# Altium PCB PCB2.PcbDoc
Units mm, origin at the board's own origin, x right, y up, seen from the top; angles counter-clockwise.
Board outline 50 x 40 mm, 2 copper layers (Top Layer, Bottom Layer); 11 components, 5 nets, 23 pads, 4 vias.
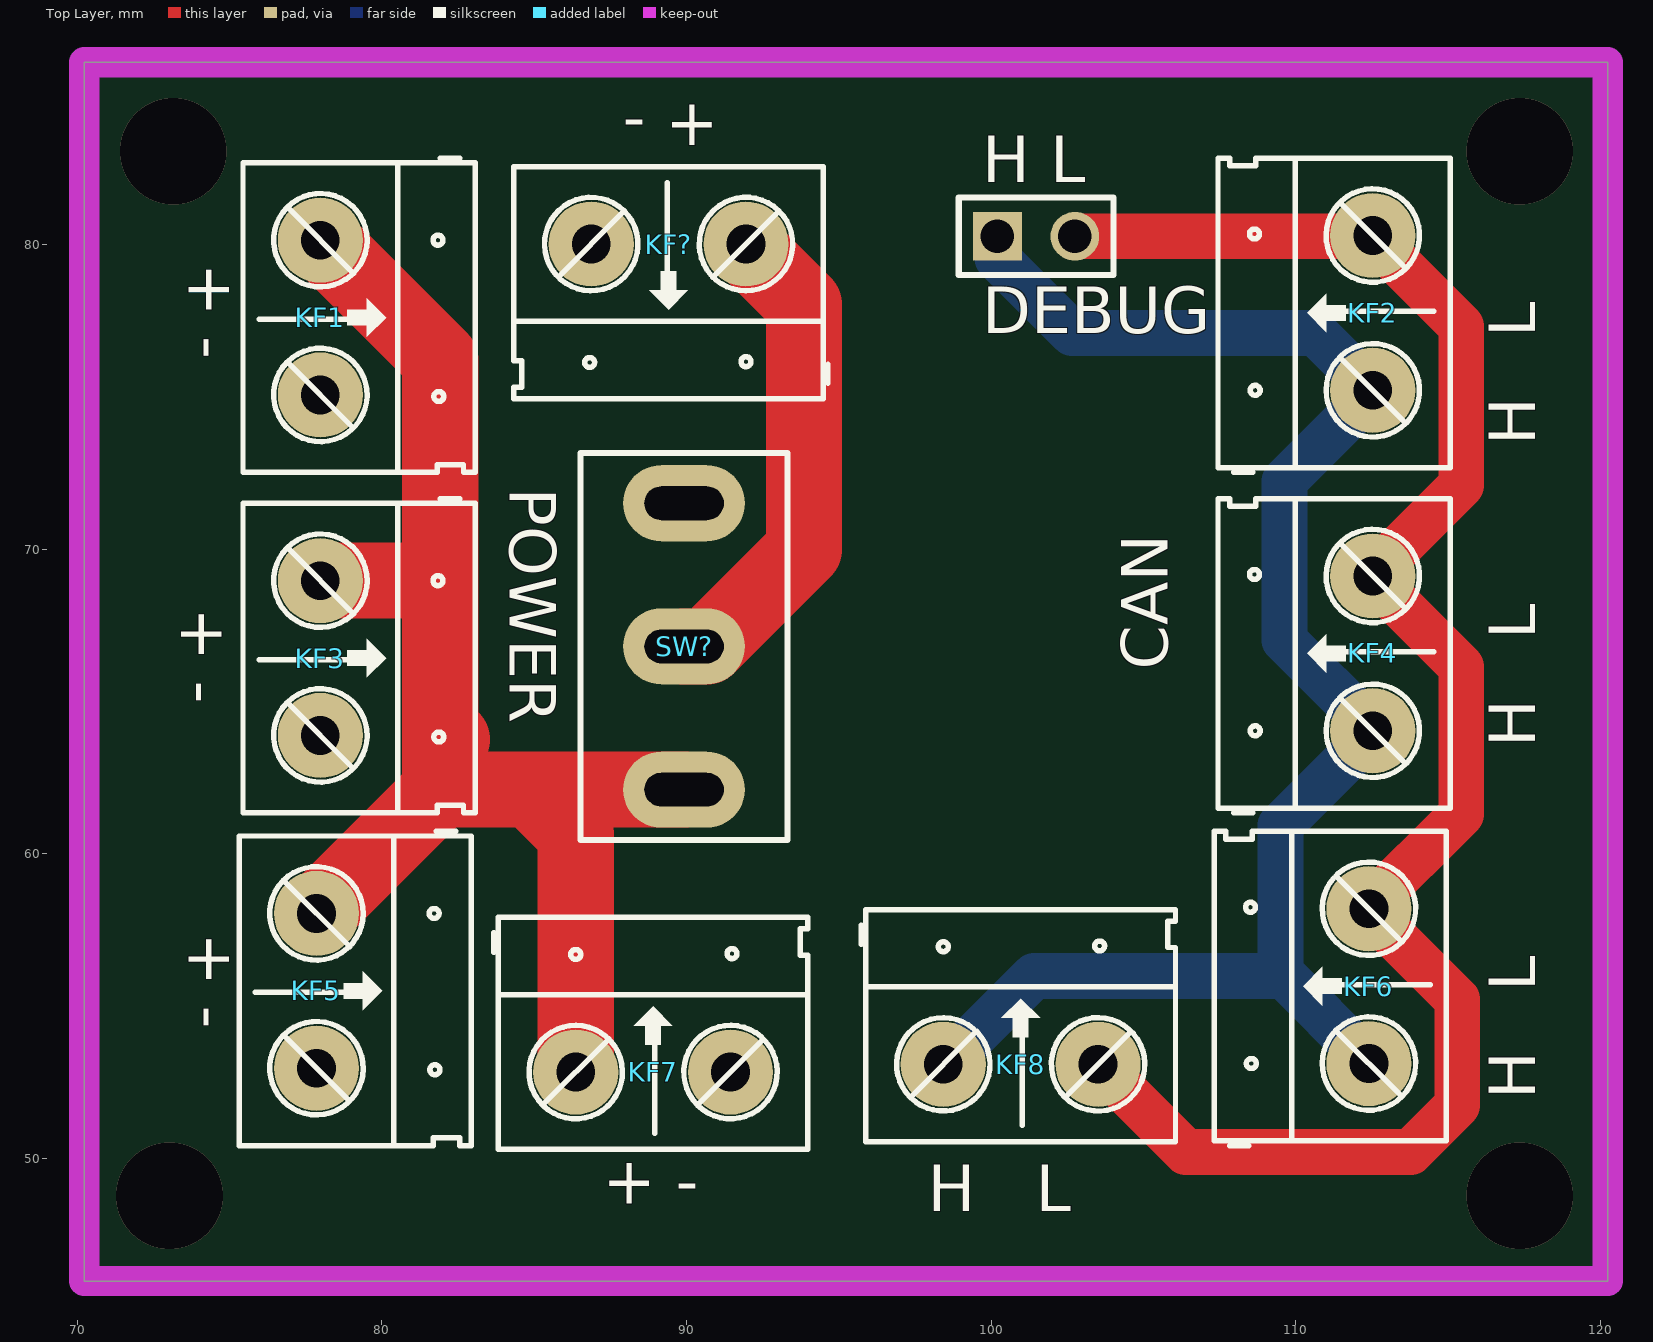
[diagram p0: Top Layer view]
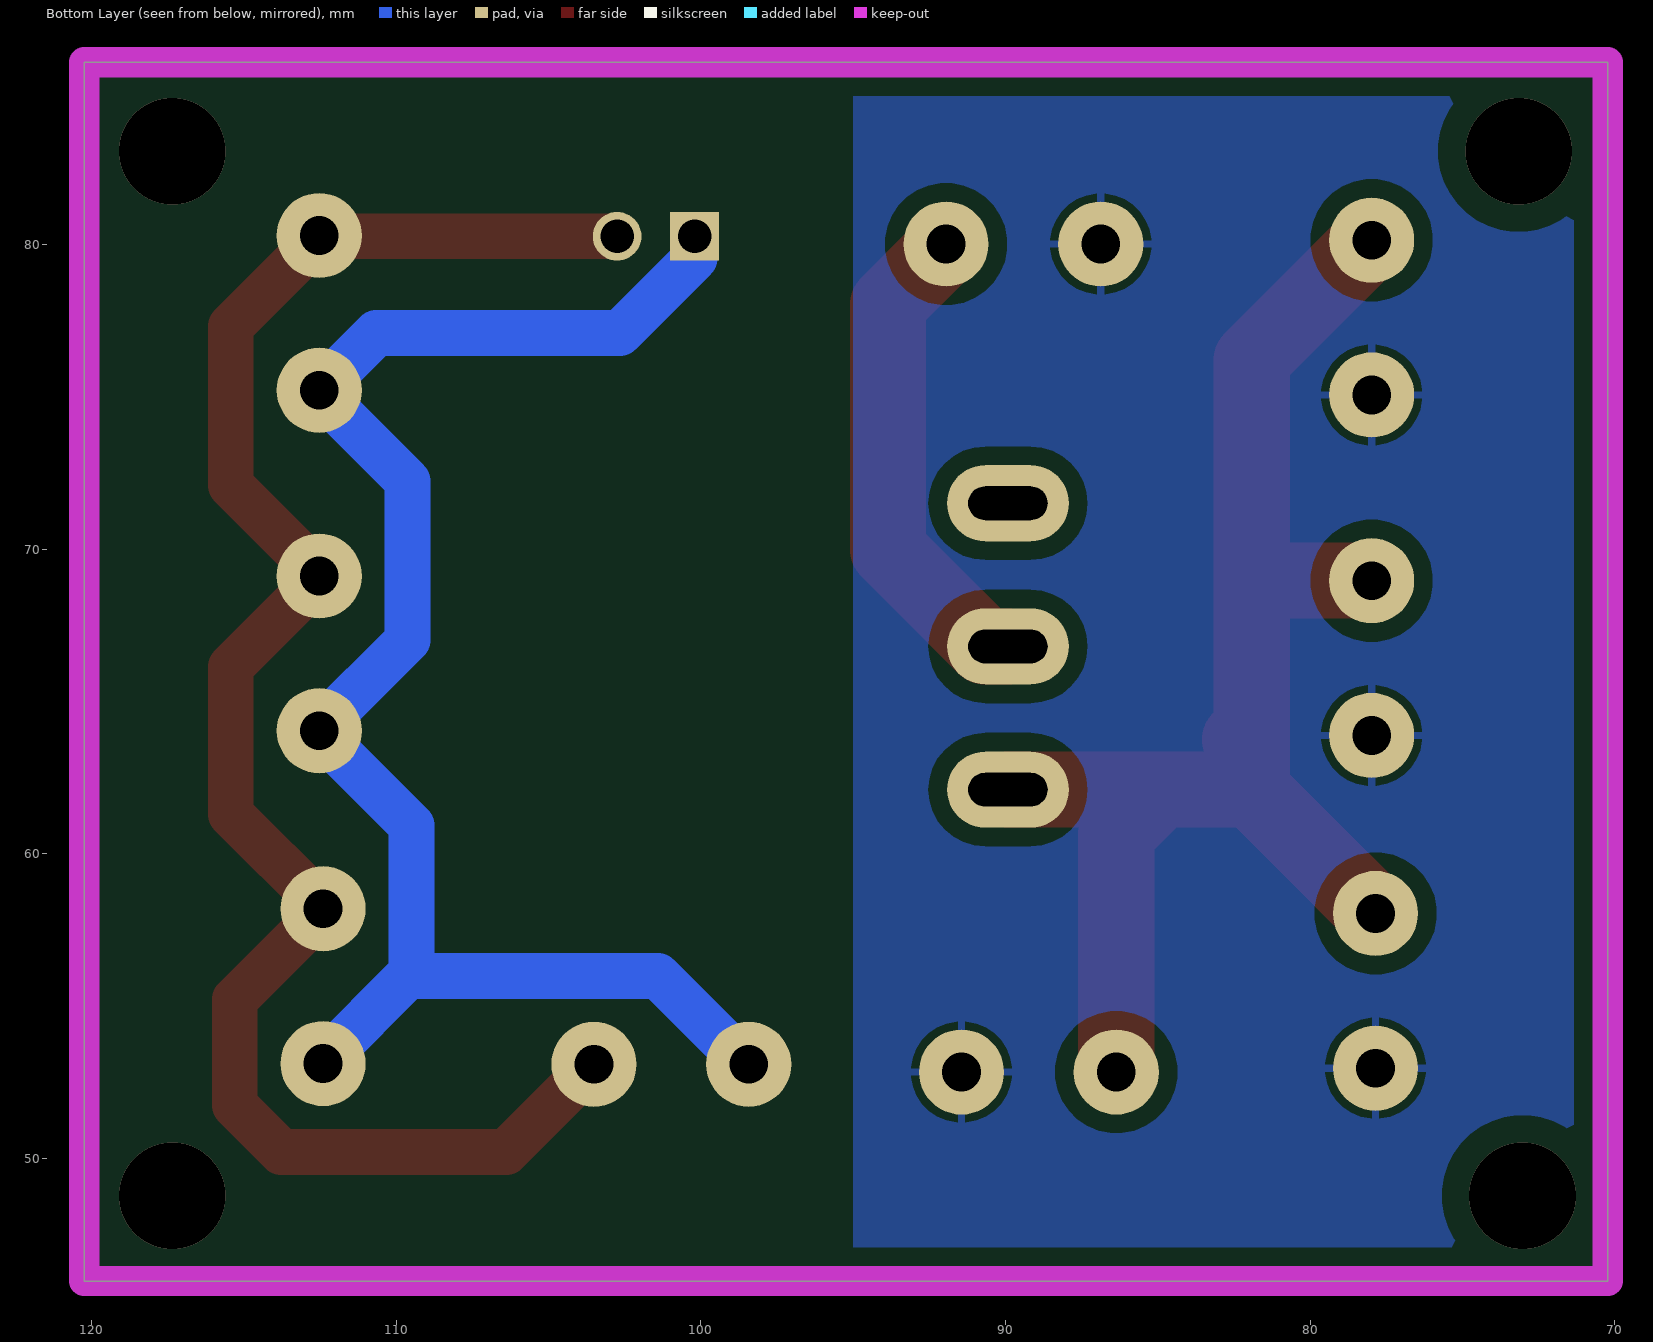
[diagram p1: Bottom Layer view, seen from below]
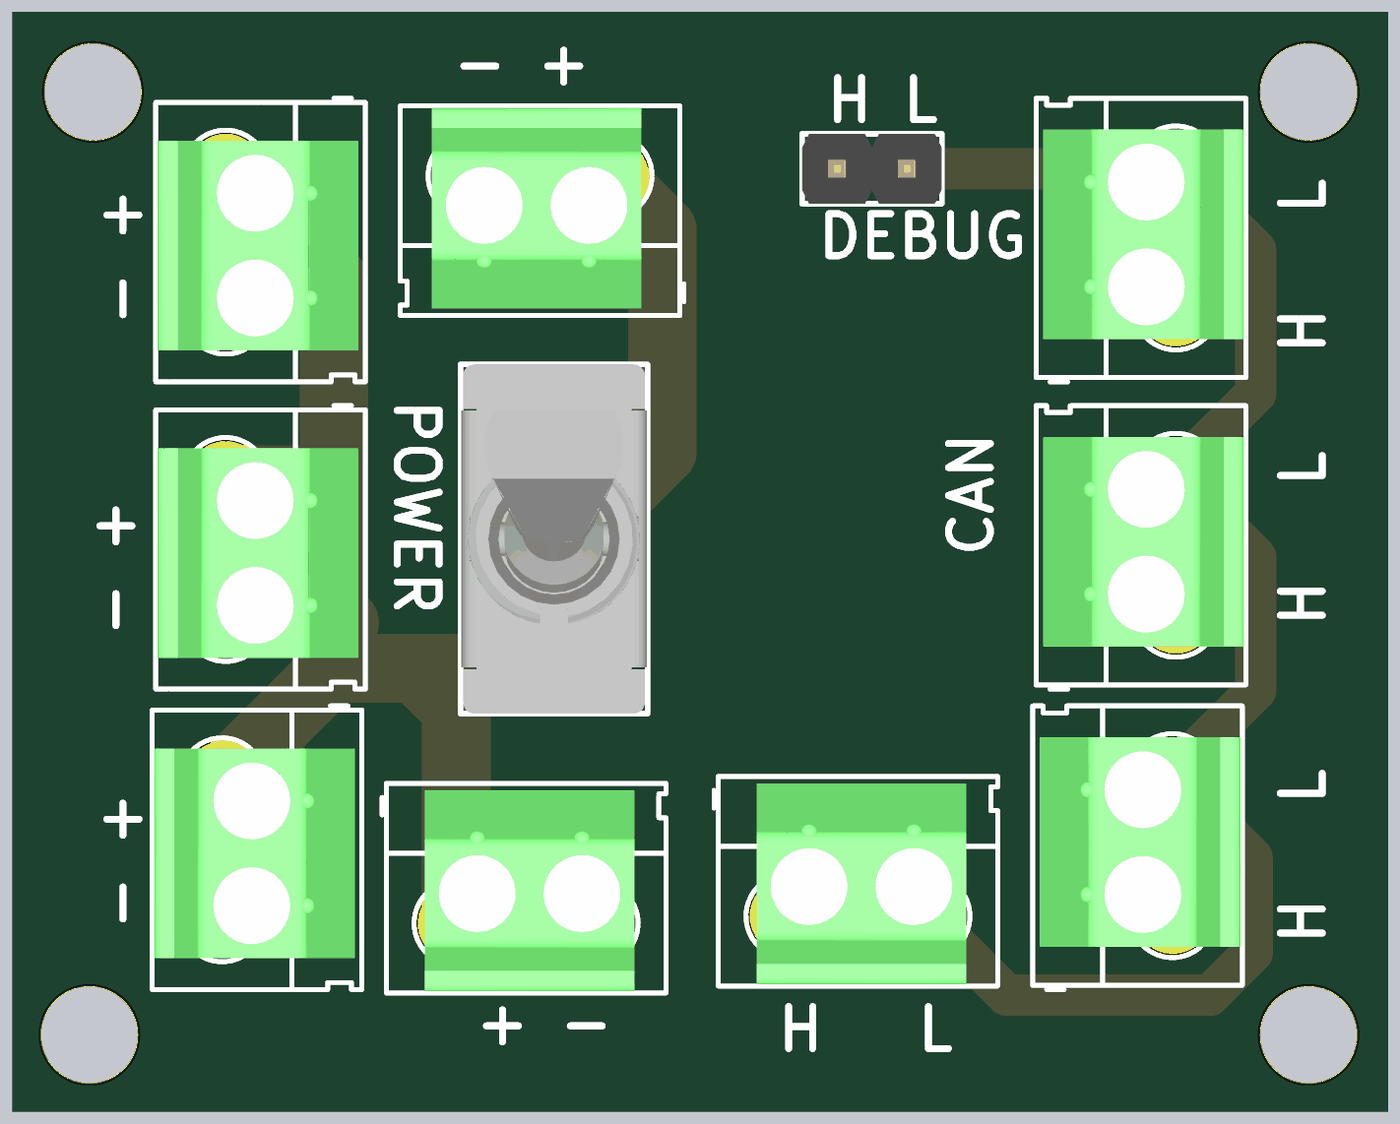
[diagram p2: 3D render of the assembled board from above, using the file's embedded part models]

## Layer stack, top to bottom
Top Solder: solder mask 0.0102, Solder Resist, Dk 3.5
Top Layer: signal copper 0.0356
Dielectric 1: dielectric 0.32, FR-4, Dk 4.8
Bottom Layer: signal copper 0.0356
Bottom Solder: solder mask 0.0102, Solder Resist, Dk 3.5

## Board outline
70.231,45.974 70.231,85.974 120.231,85.974 120.231,45.974

## Design rules (kind name [scope] priority, off if disabled: settings)
Clearance [All] p1: gap=0.6 ignorepadtopadclearanceinfootprint=FALSE
PolygonConnect [All] p1: connectstyle=Relief reliefconductorwidth=0.254 reliefentries=4 polygonreliefangle="90 Angle" airgapwidth=0.254
RoutingVias [All] p1: holewidth=0.711 width=1.27 viastyle="Through Hole" minholewidth=0.711 minwidth=1.27 maxholewidth=0.711 maxwidth=1.27
SolderMaskExpansion [All] p1: expansion=0.102 istentingtop=FALSE
Width [All] p1: maxlimit=2.5 minlimit=0.254 preferedwidth=1.5
30 further rules are at their usual default settings.

## Components (designator, comment, footprint, x,y, rotation, side; value= is the part's Value field where it differs from the comment)
DEBUG "JP 1x2 2.54" "JP 1x2 DT" 100.203,80.264 r0 top (schematic designator JP1)
KF1 "CON 2 KF301" "Con 2 KF301 5.08" 77.978,80.137 r270 top
KF2 "CON 2 KF301" "Con 2 KF301 5.08" 112.522,75.209 r90 top
KF3 "CON 2 KF301" "Con 2 KF301 5.08" 77.978,68.961 r270 top
KF4 "CON 2 KF301" "Con 2 KF301 5.08" 112.522,64.033 r90 top
KF5 "CON 2 KF301" "Con 2 KF301 5.08" 77.851,58.039 r270 top
KF6 "CON 2 KF301" "Con 2 KF301 5.08" 112.395,53.111 r90 top
KF7 "CON 2 KF301" "Con 2 KF301 5.08" 86.36,52.832 r0 top
KF8 "CON 2 KF301" "Con 2 KF301 5.08" 98.425,53.086 r0 top
KF? "CON 2 KF301" "Con 2 KF301 5.08" 91.948,80.01 r180 top
SW? "7101P3YZQE" SW_TOGGLE_7101P3YZQE 89.916,66.802 r90 top

## Footprints (in the part's own frame and the unit in brackets; to place one, negate y for a bottom-side part, rotate by r counter-clockwise, add the part's x,y. Pads: shape width x height; smd on the part's side, far side on the other; paste and mask are expansions set on the pad)
"Con 2 KF301 5.08" [mil]
  round 110 hole 50: 1(0,0) 2(200,0)
  silkscreen extent -106,-100 300,200, body extent -45,-97 255,190, height 335
"JP 1x2 DT" [mm] "2 pins, 1 row, straight, gold plating"
  rect 1.6x1.6 hole 1.1: 1(0,0)
  round 1.6 hole 1.1: 2(2.54,0)
  silkscreen extent -1.27,-1.27 3.81,1.27, body extent -1.27,-1.27 3.81,1.27, height 8.54
SW_TOGGLE_7101P3YZQE [mm]
  oval 2.5x4 hole 2.6 slot 1.1 at 0 deg: 1(-4.7,0) 2(0,0) 3(4.7,0)
  silkscreen extent -6.35,-3.4 6.35,3.4, body extent -6.35,-3.38 6.35,3.38, height 30.93

## Part data
DEBUG: library part "JP 1x2 2.54 Duc Thang", "Cắm", Chung_Loai=Cắm, Don_Vi=Con, Ma_Hang=MH000903, Ten_Linh_Kien="Jump Đơn Đực 2.54MM 1x40P Thẳng 11MM"
KF1 KF2 KF3 KF4 KF5 KF6 KF7 KF8 KF?: "Cắm", Chung_Loai=Cắm, Don_Vi=Con, Ma_Hang=MH000987, Ten_Linh_Kien="CON 2 KF301-2P 5.08MM Xanh Dương"
SW?: library part SW_TOGGLE_7101P3YZQE, "SWITCH TOGGLE SPDT 5A 120V", Current Rating="5A (AC/DC)", Illumination Type, Color=-, Manufacturer=C&K, Operating Temperature="-30°C ~ 85°C", Supplier Part Number 1=CKN1019-ND, Voltage Rating - AC=120V, Voltage Rating - DC=28V, Actuator Length=11.43mm, Actuator Material="Brass, Chrome Plated", Actuator Type="Flat Anti-Rotation", Bushing Thread=1/4-40, Category=Switches, Circuit=SPDT, ComponentLink1Description=http://www.ckswitches.com/media/1394/7000toggle.pdf, ComponentLink1URL=http://www.ckswitches.com/media/1394/7000toggle.pdf, Electrical Life="100,000 Cycles", Features="Epoxy Sealed Terminals", Illumination=Non-Illuminated, Illumination Voltage (Nominal)=-, Ingress Protection=-, Manufacturer Part Number=7101P3YZQE, Mounting Type="Panel Mount", Packaging=Bulk, Panel Cutout Dimensions="Circular - 6.35mm Dia", Part Status=Active, Pricing 1="1=6.11, 10=5.801, 25=5.648, 50=5.4954, 100=5.3428, 250=5.03744, 500=4.2742, 1000=4.04523 (USD)", RoHS="RoHS Compliant", Stock 1=933, Supplier 1=Digi-Key, Switch Function=On-On, Termination Style="Solder Lug"

## Via types
v1: diameter 3.5, hole 3.5, Top Layer to Bottom Layer, 4 vias

## Nets (pads, with @x,y where several pads share a name; then routed paths per layer and width w, separated by ;. In a path a pad name is that pad's centre, name@x,y a point inside that pad or via, vN(x,y) a via of type N, cw(c..) or ccw(c..) an arc to the next point about the centre after c; other vN are vias at no path point)
12V: KF1.1 KF3.1 KF5.1 KF7.1 SW?.1 | length 47.8
  Top Layer w2.5: KF5.1 81.915,62.103 ; KF3.1 81.915,68.961 ; KF1.1 81.915,76.2 81.915,68.961 ; 82.297,63.753 81.915,64.135 ; KF7.1 86.36,60.639 84.897,62.102 ; SW?.1 84.897,62.102 ; 81.915,62.103 81.916,62.102 84.897,62.102 ; 81.915,62.103 81.915,64.135 ; 81.915,64.135 81.915,68.961
CANH: DEBUG.1 KF2.1 KF4.1 KF6.1 KF8.1 | length 54
  Bottom Layer w1.5: KF8.1 98.505,53.086 101.406,55.987 109.44,55.987 ; DEBUG.1 100.203,79.546 102.66,77.089 110.642,77.089 KF2.1 112.522,75.13 109.621,72.229 109.621,67.014 112.522,64.113 KF4.1 112.522,63.954 109.494,60.926 109.494,56.092 112.395,53.191 KF6.1
CANL: DEBUG.2 KF2.2 KF4.2 KF6.2 KF8.2 | length 58
  Top Layer w1.5: DEBUG.2 112.497,80.264 KF2.2 112.522,80.21 115.423,77.309 115.423,72.094 112.522,69.193 KF4.2 112.522,69.034 115.423,66.133 115.423,61.299 112.395,58.271 KF6.2 112.395,58.112 115.296,55.211 115.296,51.742 113.764,50.21 106.381,50.21 KF8.2
GND: KF1.2 KF3.2 KF5.2 KF7.2 KF?.2
NetKF?_1: KF?.1 SW?.2 | length 16.1
  Top Layer w2.5: SW?.2 90.666,66.802 93.853,69.989 93.853,78.025 91.948,79.93 KF?.1
pads on no net: SW?.3
copper on no net:
  other v1: 73.025,48.768 117.348,48.768 73.152,83.058 117.348,83.058

## Polygon pours and split planes (outlines as drawn)
GND on Bottom Layer "GND_L02_P000" (solid, remove dead copper, pour order 0): 70.104,85.852 70.231,85.979 94.996,85.979 94.996,46.228 95.25,45.974 95.123,45.847 70.231,45.847

## Keep-outs
Keep-Out Layer:
  the board outline again, w1

## Silkscreen, mask and mechanical layers (free items; w line width, h text height)
Top Overlay:
  text "+ -" at 91.059,84.582 h1.52 r180
  text "H L" at 99.695,82.042 h1.52
  text "+ -" at 73.66,79.375 h1.52 r270
  text "H   L" at 117.856,73.406 h1.52 r90
  text "POWER" at 84.201,72.009 h1.52 r270
  text "+ -" at 73.406,68.072 h1.52 r270
  text "CAN" at 105.791,66.04 h1.52 r90
  text "H   L" at 117.856,63.5 h1.52 r90
  text "+ -" at 73.66,57.404 h1.52 r270
  text "H   L" at 117.856,51.943 h1.52 r90
  text "+ -" at 87.249,48.514 h1.52
  text "H   L" at 97.917,48.26 h1.52